# EAGLE board Relay Board Destama RN 21507334088 (EAGLE 9.6.2)
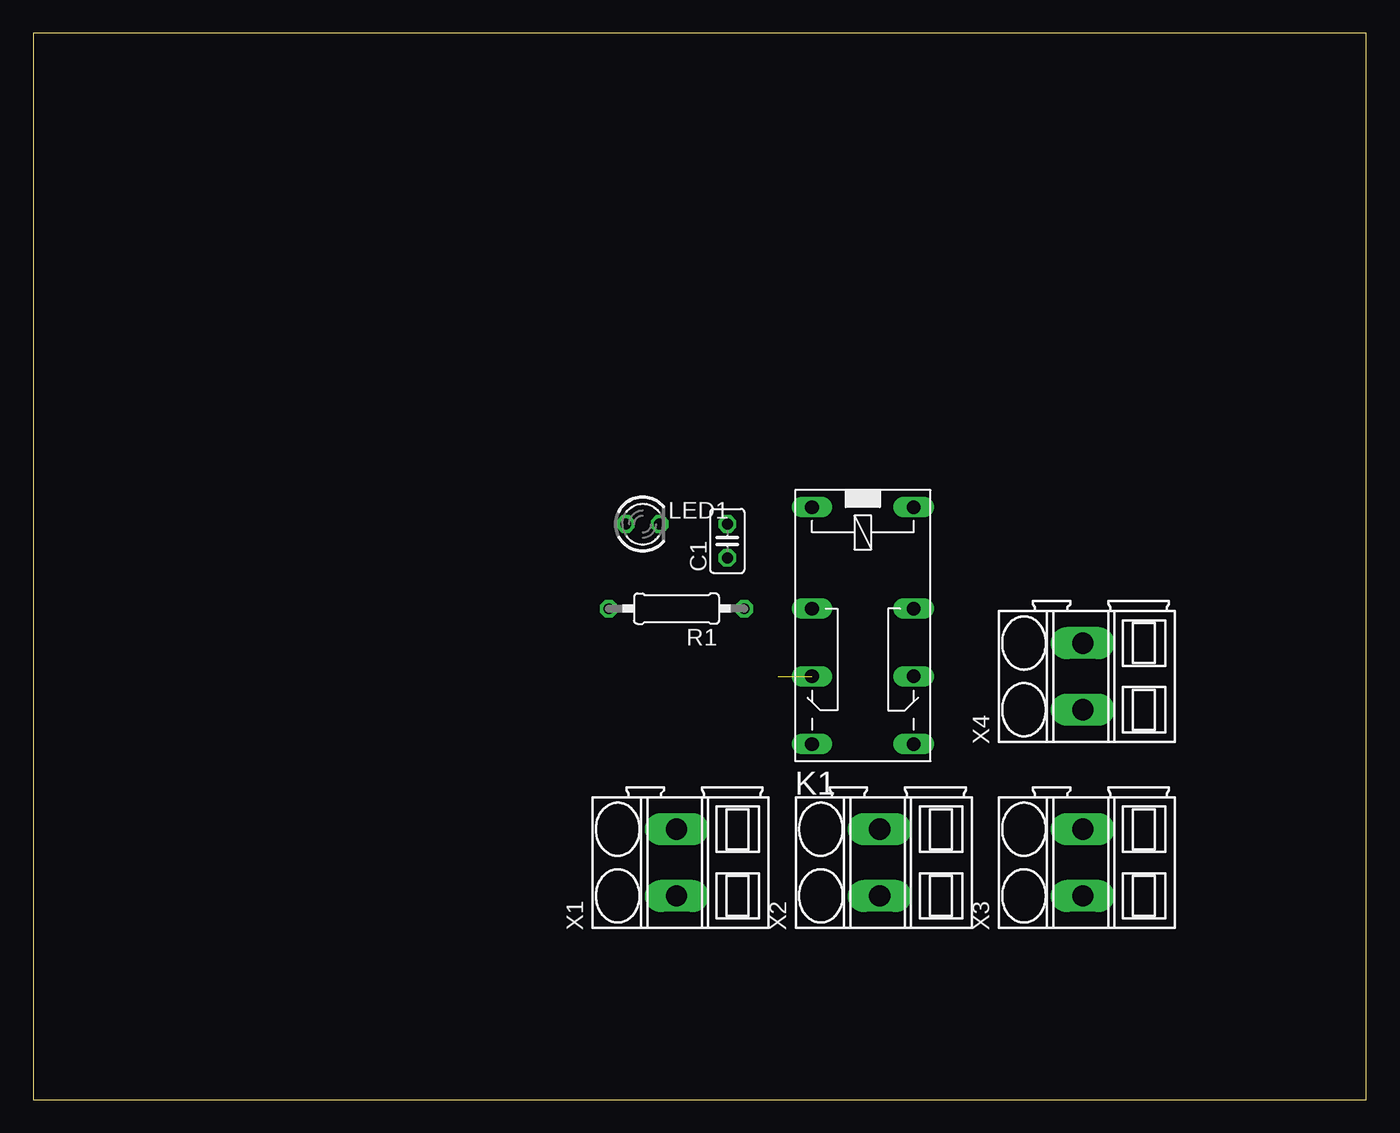
[diagram p0: board, top side]
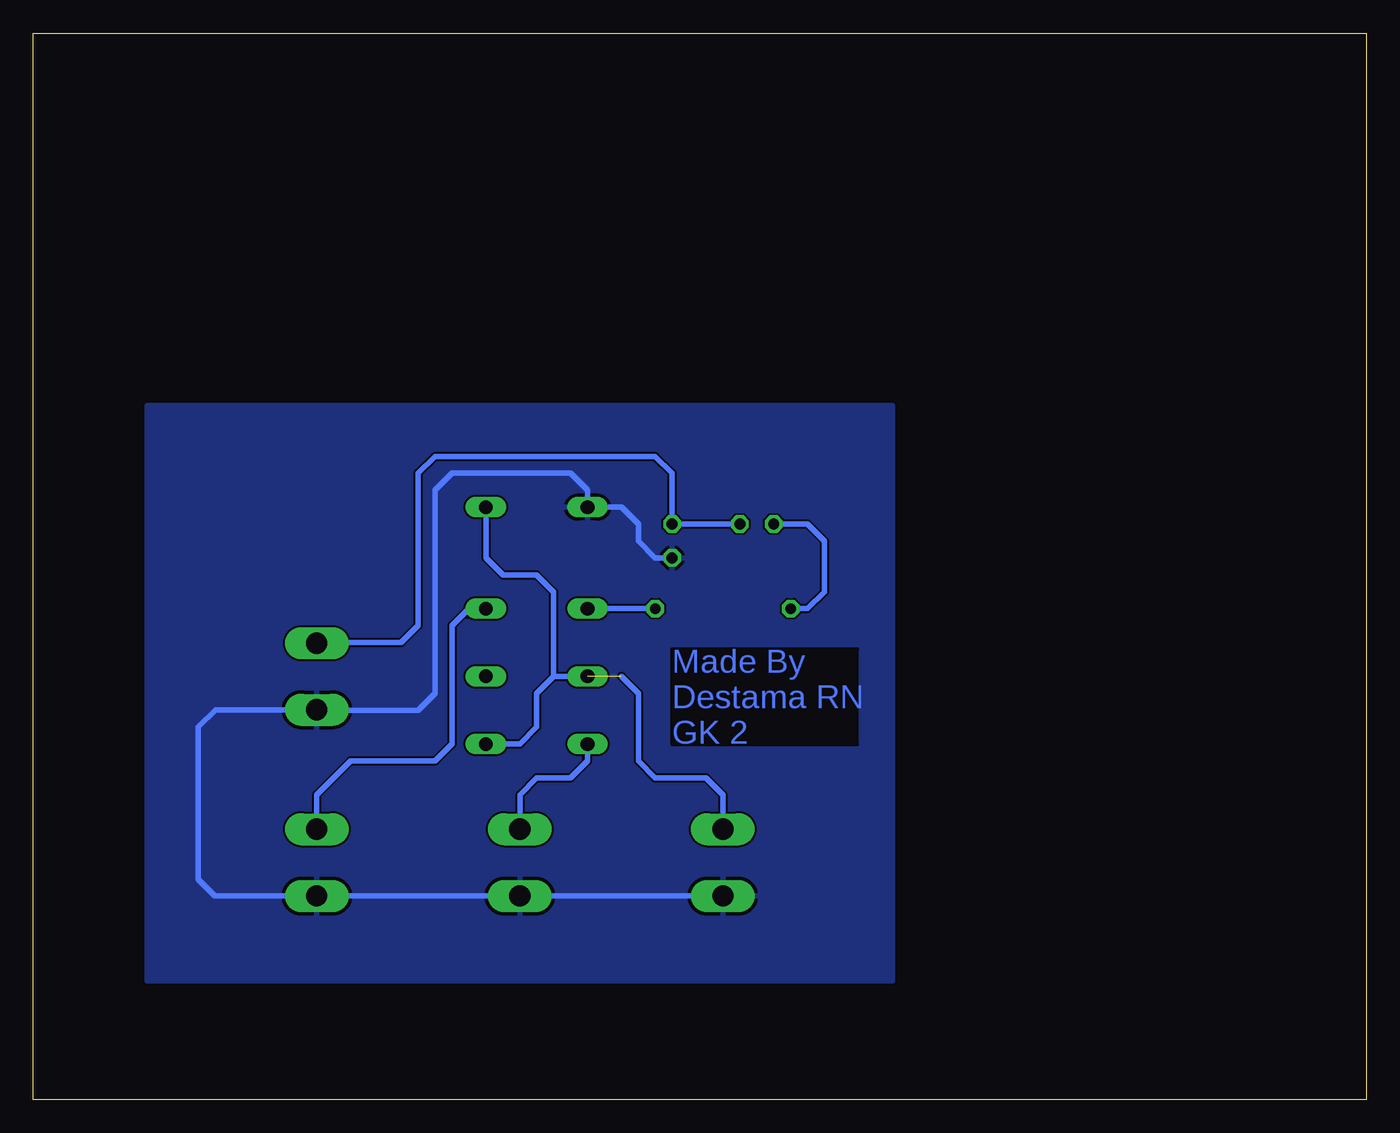
[diagram p1: board, bottom side, seen from below]

Size 100 x 80 mm. Coordinates in mm from the lower left corner, seen from the top.
Outline: 0,0 100,0 100,80 0,80 0,0
Copper layers (1*16): Top 0.035mm / dielectric 1.5mm / Bottom 0.035mm
Design rules "default": minimum track width 6mil, minimum drill 0.35mm, track to track 6mil, track to pad 6mil, pad to pad 6mil, via to via 6mil, smd to smd 6mil, copper to edge 40mil, drill to drill 6mil, minimum pad ring 10mil, minimum via ring 8mil, stop-mask expansion 4mil, vias tented up to drill 0mil, thermal gap 10mil

## Footprints (pad centres in the part's own frame; a part is rotated, then mirrored left to right if it is on the bottom)
C025-025X050 = drill 0.813 octagon: 1 -1.27,0; 2 1.27,0
351 = drill 1.016 long: 1 -3.81,-3.81; 16 -3.81,3.81; O1 8.89,-3.81; O2 8.89,3.81; P1 3.81,-3.81; P2 3.81,3.81; S1 13.97,-3.81; S2 13.97,3.81
LED3MM = drill 0.813 octagon: A -1.27,0; K 1.27,0
0207/10 = drill 0.813 octagon: 1 -5.08,0; 2 5.08,0
SMKDSP_1,5/2 = drill 1.6 pad 1.8 long: 1 -2.5,0; 2 2.5,0

## Placement (x,y rotation side)
C1  [C025-025X050]  52.07,41.91 90 top
K1  351  [351]  62.23,40.64 270 top
LED1  [LED3MM]  45.72,43.18 0 top
R1  [0207/10]  48.26,36.83 180 top
X1  SMKDSP_1,5/2  [SMKDSP_1,5/2]  48.26,17.78 90 top
X2  SMKDSP_1,5/2  [SMKDSP_1,5/2]  63.5,17.78 90 top
X3  SMKDSP_1,5/2  [SMKDSP_1,5/2]  78.74,17.78 90 top
X4  SMKDSP_1,5/2  [SMKDSP_1,5/2]  78.74,31.75 90 top

## Library data of the parts
C1 = rcl; SPICEPREFIX: C
K1 = relay; OC_FARNELL: unknown; OC_NEWARK: unknown
LED1 = led
R1 = rcl; SPICEPREFIX: R
X1-X4 = con-phoenix-smkdsp; MF: FARNELL; MPN: 1733570; OC_FARNELL: 3041244; OC_NEWARK: 69C8588

## Nets
GND: C1.1 K1.1 X1.1 X2.1 X3.1 X4.1
N$1: K1.P1 R1.1
N$2: LED1.A R1.2
O1: K1.S1 X2.2
P2: K1.P2 X3.2
S12: K1.16 K1.O1 K1.S2 X1.2
VOUT: C1.2 LED1.K X4.2

## Tracks (layer width: path | path; a pad name or v marks a point on that pad's centre or on a via)
GND
  Bottom 0.406: X1.1 X2.1 X3.1 86.4,15.28 87.63,16.51 87.63,27.94 86.32,29.25 X4.1 78.7,29.21 71.12,29.21 69.85,30.48 69.85,45.72 68.58,46.99 59.69,46.99 58.42,45.72 K1.1 55.88,44.45 54.61,43.18 54.61,41.91 53.34,40.64 C1.1
  pour Bottom: 35.56,11.43 35.56,52.07 90.17,52.07 91.44,52.07 91.44,8.89 35.56,8.89
N$1
  Bottom 0.406: R1.1 K1.P1
N$2
  Bottom 0.406: LED1.A 41.91,43.18 40.64,41.91 40.64,38.1 41.91,36.83 R1.2
O1
  Bottom 0.406: X2.2 63.5,22.86 62.23,24.13 59.69,24.13 58.42,25.4 K1.S1
P2
  Bottom 0.406: X3.2 78.74,22.86 76.2,25.4 69.85,25.4 68.58,26.67 68.58,35.56 67.31,36.83 K1.P2
S12  (1 unrouted)
  Bottom 0.406: K1.S2 63.5,26.67 62.23,27.94 62.23,30.48 60.96,31.75 | 60.96,31.75 K1.O1 | K1.16 66.04,40.64 64.77,39.37 62.23,39.37 60.96,38.1 60.96,31.75 | X1.2 48.26,22.86 49.53,24.13 53.34,24.13 54.61,25.4 54.61,30.48 55.88,31.75
VOUT
  Bottom 0.406: X4.2 78.7,34.29 72.39,34.29 71.12,35.56 71.12,46.99 69.85,48.26 53.34,48.26 52.07,46.99 C1.2 LED1.K

## Text on the board
Bottom: Made By / Destama RN / GK 2